# Altium PCB Slot.PcbDoc (part 1 of 4)
Units mm, origin at the board's own origin, x right, y up, seen from the top; angles counter-clockwise.
Board outline 152.4 x 101.6 mm, 2 copper layers (Top Layer, Bottom Layer); 34 components, 37 nets, 230 pads, 62 vias.
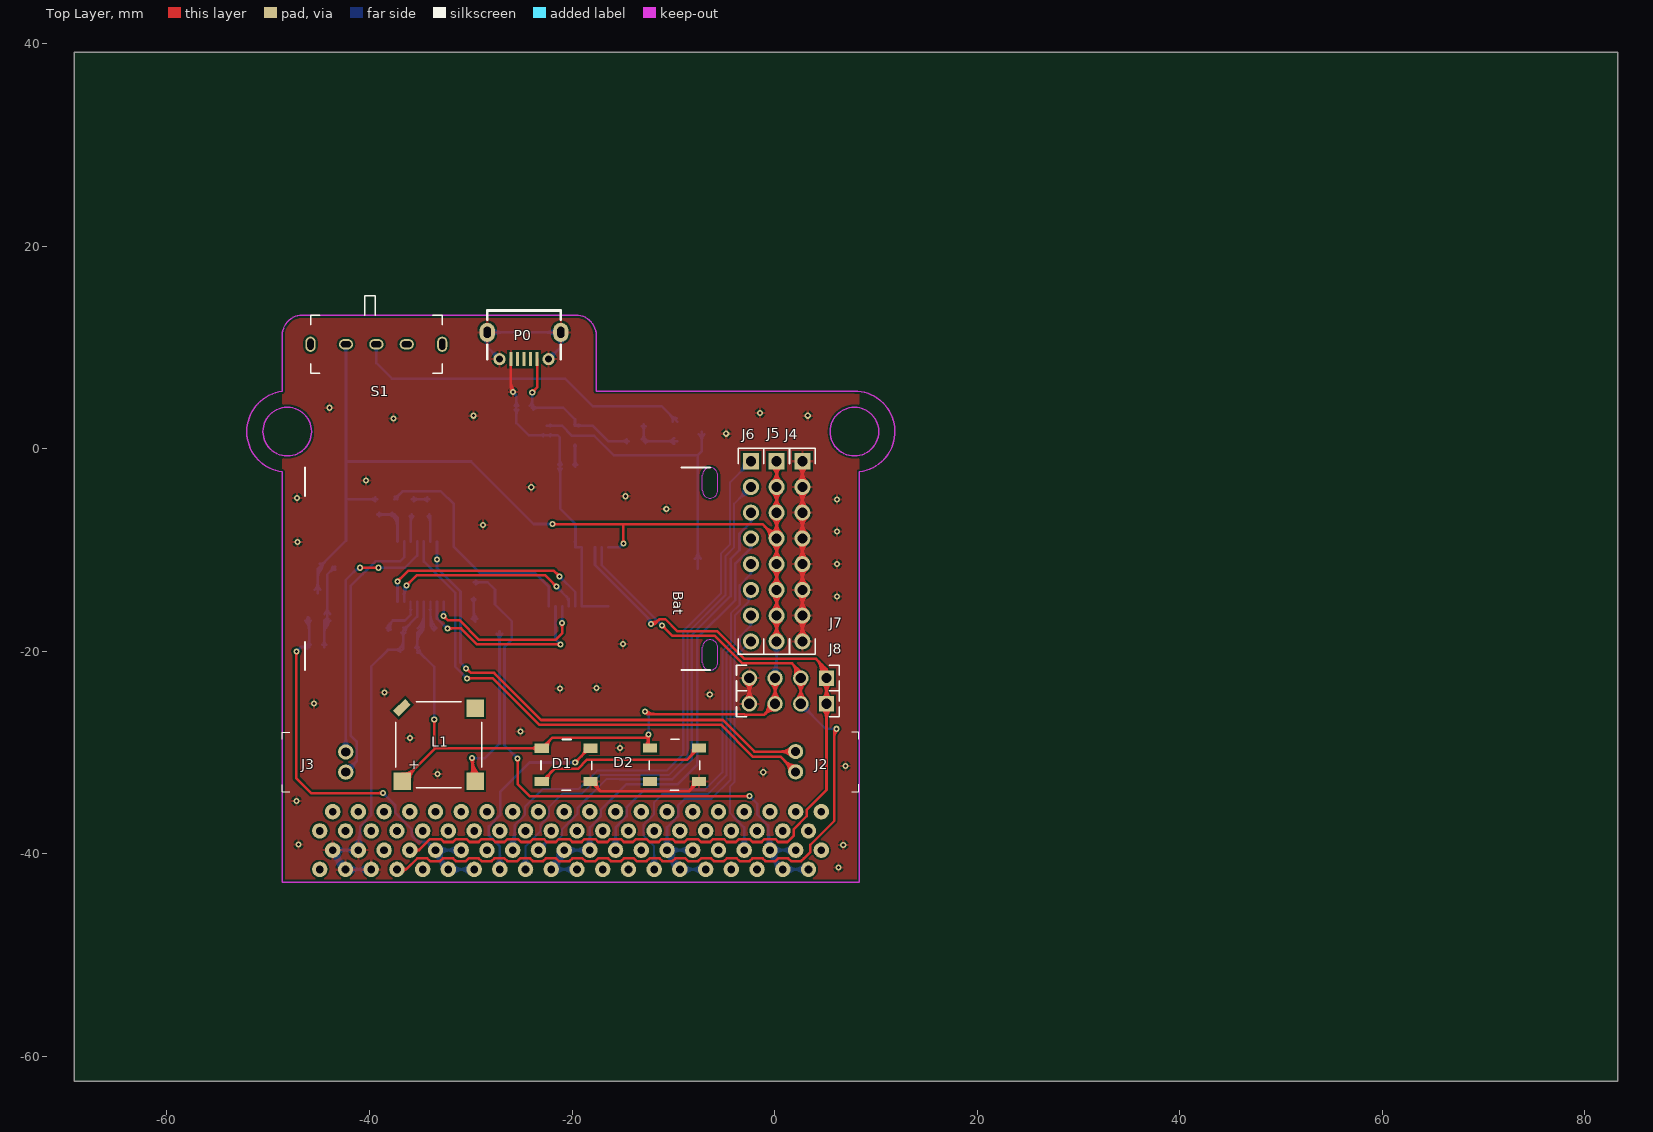
[diagram p0: Top Layer view]
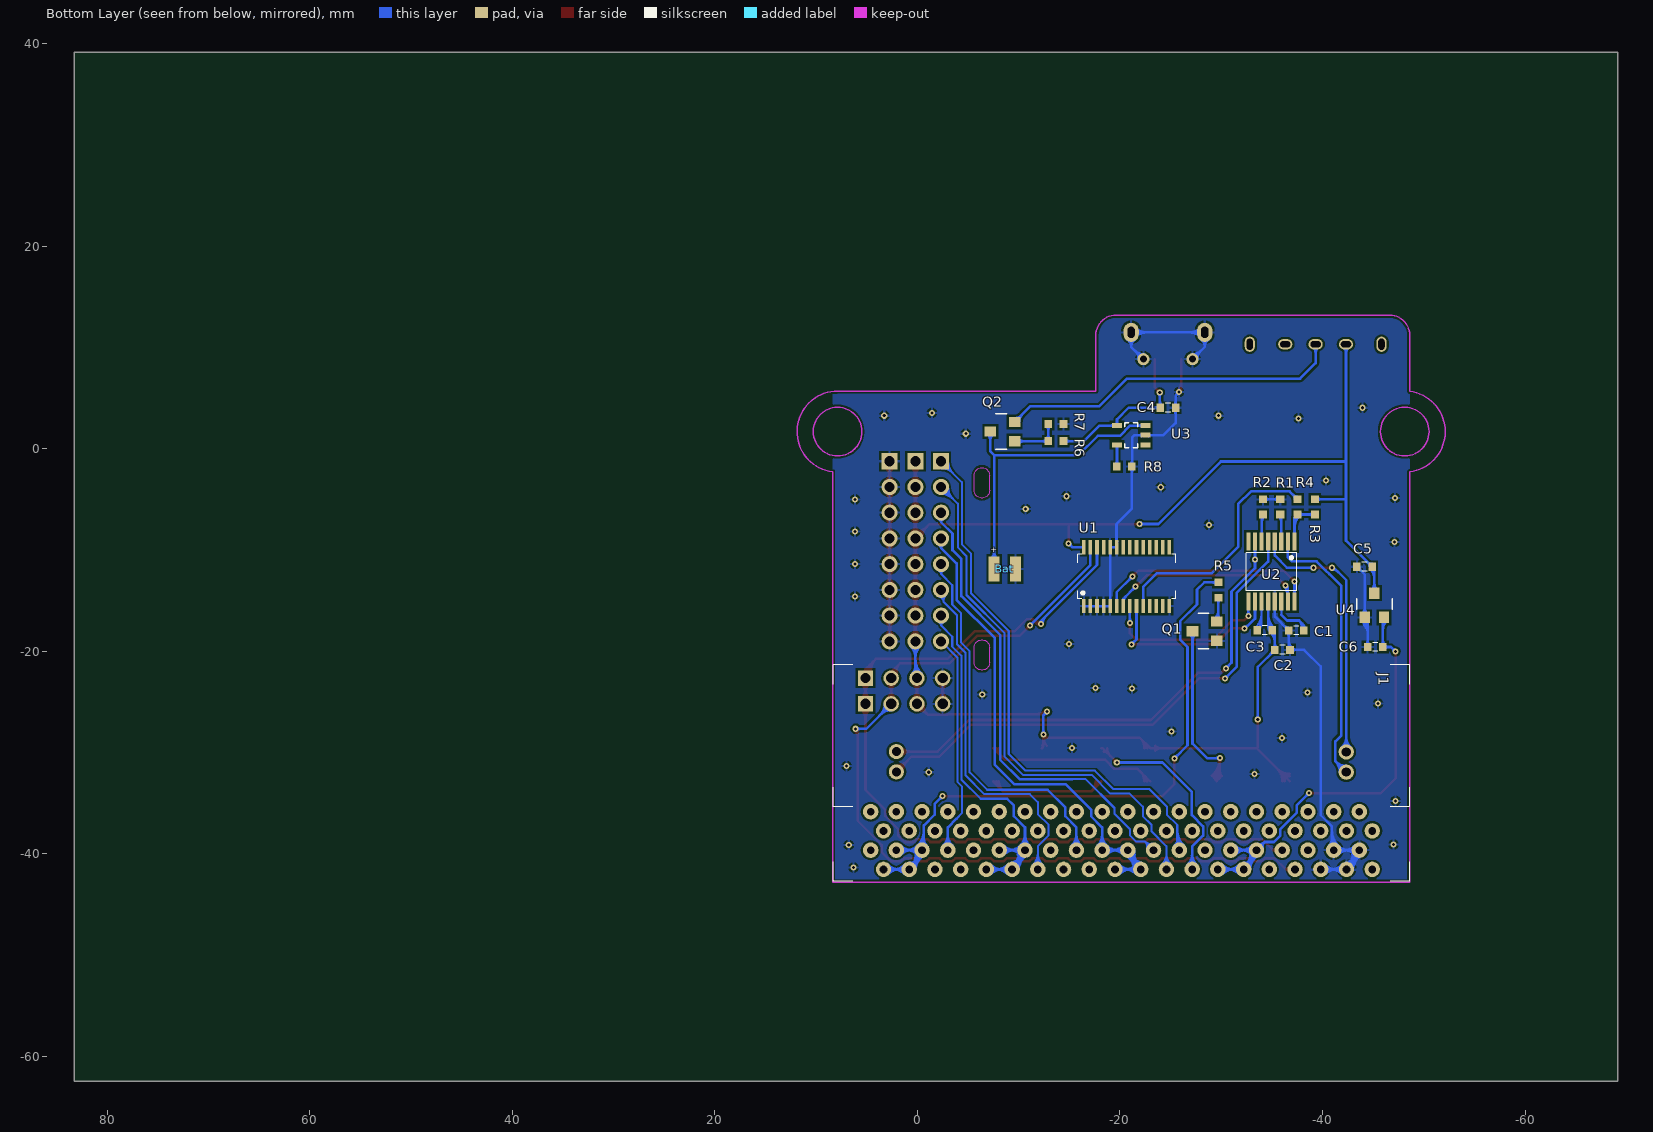
[diagram p1: Bottom Layer view, seen from below]

## Layer stack, top to bottom
Top Layer: signal copper 0.0356
Dielectric: dielectric 0.32, FR-4, Dk 4.8
Bottom Layer: signal copper 0.0356

## Board outline
-69.148,-62.438 83.252,-62.438 83.252,39.162 -69.148,39.162

## Design rules (kind name [scope] priority, off if disabled: settings)
Clearance [All] p1: gap=0.203
MinimumSolderMaskSliver [All] p1: minsoldermaskwidth=0
PolygonConnect [All] p1: connectstyle=Relief reliefconductorwidth=0.254 reliefentries=4 polygonreliefangle="90 Angle"
RoutingVias [All] p1: holewidth=0.3 width=0.6 viastyle="Through Hole" minholewidth=0.3 minwidth=0.6 maxholewidth=0.3 maxwidth=0.6
SilkToSilkClearance [All] p1: silktosilkclearance=0
SilkscreenOverComponentPads [All] p1: minsilkscreentomaskgap=0
SolderMaskExpansion [All] p1: expansion=0.102
Width [All] p1: maxlimit=0.254 minlimit=0.152 preferedwidth=0.203
25 further rules are at their usual default settings.

## Components (designator, comment, footprint, x,y, rotation, side; value= is the part's Value field where it differs from the comment)
Bat "" BAT-2040 -6.375,-1.854 r0 top locked
C1 "" C0603 -37.414,-17.932 r270 bottom
C2 "" C0603 -36.043,-19.837 r270 bottom
C3 "16V" C0603 -34.29,-17.907 r90 bottom
C4 "" C0603 -24.74,4.064 r270 bottom
C5 "" C0603 -44.145,-11.633 r90 bottom
C6 "" C0603 -45.212,-19.558 r90 bottom
D1 "WS2812B" WS2812B -23.066,-28.695 r0 top locked
D2 "WS2812B" WS2812B -12.372,-28.684 r0 top locked
J1 "MICROBIT_SLOT" microbit_slot 4.62,-35.821 r180 bottom locked
J2 "" S2B-PH-K-S 2.08,-29.889 r0 top locked
J3 "" S2B-PH-K-S -42.344,-31.921 r180 top locked
J4 "CON8" CON8 2.743,-1.219 r0 top
J5 "CON8" CON8 0.203,-1.219 r0 top
J6 "CON8" CON8 -2.337,-1.219 r0 top
J7 "" CON4 5.128,-25.171 r180 top
J8 "" CON4 5.128,-22.631 r180 top
L1 "Buz" Buzzer -28.908,-24.961 r270 top
P0 "" USB_MICRO -24.74,8.865 r0 top
Q1 "2N3904" SOT23-3 -29.566,-18.948 r0 bottom
Q2 "DMP2305U" SOT23-3 -9.601,0.762 r0 bottom
R1 "200R" R0603 -35.827,-6.477 r0 bottom
R2 "200R" R0603 -34.112,-6.477 r0 bottom
R3 "20K" R0603 -39.243,-6.477 r0 bottom
R4 "0R" R0603 -37.541,-6.477 r0 bottom
R5 "470R" R0603 -29.718,-13.183 r180 bottom
R6 "10k" R0603 -14.423,0.762 r270 bottom
R7 "1M" R0603 -14.423,2.454 r270 bottom
R8 "8.2k" R0603 -21.184,-1.753 r270 bottom
S1 "" SWITCH-1 -45.822,13.183 r0 top
U1 "PCA9685" TSSOP-28 -16.434,-15.519 r90 bottom
U2 "DRV8833" TSSOP-16 -37.236,-9.144 r270 bottom
U3 "CE3150AM" SOT23-5 -22.504,0.406 r90 bottom
U4 "S-1206B30-M3T1G(S)" SOT23-3 -44.171,-16.637 r90 bottom

## Footprints (in the part's own frame and the unit in brackets; to place one, negate y for a bottom-side part, rotate by r counter-clockwise, add the part's x,y. Pads: shape width x height; smd on the part's side, far side on the other; paste and mask are expansions set on the pad)
BAT-2040 [mm]
  rect 1.1x2.5 smd far side: 1(-1.2,-10) 2(-3.3,-10)
  Keep-Out Layer lines w0.1: -0.75,-19.25 ccw(c0,-19.25) 0.75,-19.25 0.75,-17.75 ccw(c0,-17.75) -0.75,-17.75 -0.75,-19.25 ; -0.75,-2.25 ccw(c0,-2.25) 0.75,-2.25 0.75,-0.75 ccw(c0,-0.75) -0.75,-0.75 -0.75,-2.25
  silkscreen extent -40,-20 0,0
Buzzer [mm]
  rect 1.7x1.7 smd: 1(7.85,-7.85) 2(7.85,-0.65) ""(0.65,-0.65)
  rect 1.7x0.8 smd rot 135: ""(0.6,-7.9)
  silkscreen extent 0,-8.5 8.5,0
C0603 [mm] "0.8(无"
  rect 0.8x0.75 smd: 1(0,0.75) 2(0,-0.75)
  silkscreen extent -0.43,-0.25 0.43,0.25
CON4 [mil] "2.54mm"
  rect 60x60 hole 40: 1(0,0)
  round 60 hole 40: 2(100,0) 3(200,0) 4(300,0)
  silkscreen extent -50,-50 350,50
CON8 [mm] "2.54针"
  rect 1.6x1.6 hole 1: 1(0,0)
  round 1.6 hole 1: 2(0,-2.54) 3(0,-5.08) 4(0,-7.62) 5(0,-10.16) 6(0,-12.7) 7(0,-15.24) 8(0,-17.78)
  silkscreen extent -1.27,-19.05 1.27,1.27
microbit_slot [mil]
  round 60 hole 30: 1(0,-149.61) 2(0,0) 3(50,-224.41) 4(50,-74.8) 5(100,-149.61) 6(100,0) 7(150,-224.41) 8(150,-74.8) 9(200,-149.61) 10(200,0) 11(250,-224.41) 12(250,-74.8) 13(300,-149.61) 14(300,0) 15(350,-224.41) 16(350,-74.8) 17(400,-149.61) 18(400,0) 19(450,-224.41) 20(450,-74.8) 21(500,-149.61) 22(500,0) 23(550,-224.41) 24(550,-74.8) 25(600,-149.61) 26(600,0) 27(650,-224.41) 28(650,-74.8) 29(700,-149.61) 30(700,0) 31(750,-224.41) 32(750,-74.8) 33(800,-149.61) 34(800,0) 35(850,-224.41) 36(850,-74.8) 37(900,-149.61) 38(900,0) 39(950,-224.41) 40(950,-74.8) 41(1000,-149.61) 42(1000,0) 43(1050,-224.41) 44(1050,-74.8) 45(1100,-149.61) 46(1100,0) 47(1150,-224.41) 48(1150,-74.8) 49(1200,-149.61) 50(1200,0) 51(1250,-224.41) 52(1250,-74.8) 53(1300,-149.61) 54(1300,0) 55(1350,-224.41) 56(1350,-74.8) 57(1400,-149.61) 58(1400,0) 59(1450,-224.41) 60(1450,-74.8) 61(1500,-149.61) 62(1500,0) 63(1550,-224.41) 64(1550,-74.8) 65(1600,-149.61) 66(1600,0) 67(1650,-224.41) 68(1650,-74.8) 69(1700,-149.61) 70(1700,0) 71(1750,-224.41) 72(1750,-74.8) 73(1800,-149.61) 74(1800,0) 75(1850,-224.41) 76(1850,-74.8) 77(1900,-149.61) 78(1900,0) 79(1950,-224.41) 80(1950,-74.8)
  silkscreen extent -145,-270 2095,571
R0603 [mm] "Microbit"
  rect 0.8x0.75 smd: 1(0,0) 2(0,-1.5)
S2B-PH-K-S [mm] "JST"
  round 1.5 hole 0.9: 1(0,0) 2(0,-2)
  silkscreen extent 5.54,-3.95 6.25,1.95
SOT23-3 [mil]
  rect 45x40 smd: 1(0,0) 2(0,-74.8) 3(94.49,-37.4)
  silkscreen extent 31,-106 73,31
SOT23-5 [mm]
  rect 0.5x1 smd: 1(0,0) 2(0.95,0) 3(1.9,0) 4(1.9,2.8) 5(0,2.8)
  silkscreen extent -0.3,0.76 2.18,2.03
SWITCH-1 [mm] "拨"
  oval 1.4x1 hole 0.6 slot 1 at 0 deg: 1(3.5,-2.85) 2(6.5,-2.85) 3(9.5,-2.85)
  oval 1x1.5 hole 0.6 slot 1.1 at 90 deg: ""(0,-2.85) ""(13,-2.85)
  silkscreen extent 0,-5.7 13,1.96
TSSOP-16 [mm]
  rect 1.78x0.42 smd: 1(0,0) 2(0,-0.65) 3(0,-1.3) 4(0,-1.95) 5(0,-2.6) 6(0,-3.25) 7(0,-3.9) 8(0,-4.55) 9(5.94,-4.55) 10(5.94,-3.9) 11(5.94,-3.25) 12(5.94,-2.6) 13(5.94,-1.95) 14(5.94,-1.3) 15(5.94,-0.65) 16(5.94,0)
  silkscreen extent 1.09,-4.77 4.85,0.23
TSSOP-28 [mm]
  rect 1.4x0.35 smd: 1(0,0) 2(0,-0.65) 3(0,-1.3) 4(0,-1.95) 5(0,-2.6) 6(0,-3.25) 7(0,-3.9) 8(0,-4.55) 9(0,-5.2) 10(0,-5.85) 11(0,-6.5) 12(0,-7.15) 13(0,-7.8) 14(0,-8.45) 15(5.8,-8.45) 16(5.8,-7.8) 17(5.8,-7.15) 18(5.8,-6.5) 19(5.8,-5.85) 20(5.8,-5.2) 21(5.8,-4.55) 22(5.8,-3.9) 23(5.8,-3.25) 24(5.8,-2.6) 25(5.8,-1.95) 26(5.8,-1.3) 27(5.8,-0.65) 28(5.8,0)
  silkscreen extent 0.7,-9.08 5.1,0.62
USB_MICRO [mil] "USB Micro SMT 5S B"
  rect 11.81x54 smd: 1(51,0) 2(25.5,0) 3(0,0) 4(-25.5,0) 5(-51,0)
  oval 59.06x74.8 hole 27.56 slot 43.31 at 90 deg: 6(-143,104) 6(143,104)
  round 47.24 hole 27.5: 6(-95.5,0) 6(95.5,0)
  silkscreen extent -143,0 143,189
WS2812B [mm]
  rect 1.4x0.9 smd: 1(0.07,-0.86) 2(0.076,-4.14) 3(4.9,-4.14) 4(4.9,-0.86)
  silkscreen extent 0,-5 5,0

## Part data
Bat: library part Battery2040, "2x4cm Li-bat"
C1 C2 C3 C4 C5 C6: library part Cap
J2 J3: library part CON2_power
J7 J8: library part CON4
L1: library part Buzzer
P0: library part micro_usb
Q1: "NPN General Purpose Amplifier"
Q2: library part "MOSFET P"
R1 R2 R3 R4 R5 R6 R7 R8: library part Res
S1: library part CON3, "Header, 3-Pin"
U2: "TSSOP-16"
U3: "LI-Ion battery charger with Thermal Regulation"
U4: library part S-1206BXX

## Via types
v1: diameter 0.6, hole 0.3, Top Layer to Bottom Layer, 62 vias

## Nets (pads, with @x,y where several pads share a name; then routed paths per layer and width w, separated by ;. In a path a pad name is that pad's centre, name@x,y a point inside that pad or via, vN(x,y) a via of type N, cw(c..) or ccw(c..) an arc to the next point about the centre after c; other vN are vias at no path point)
5V: C4.2 P0.1 R6.1 U3.4 | length 27
  Top Layer w0.254: v1(-23.927,5.588) -23.444,6.071 P0.1@-23.444,8.865 ; v1@-23.927,5.761 ccw(c-23.927,6.179) -23.631,5.883 ccw(c-23.336,5.588) v1@-23.754,5.588
  Bottom Layer w0.254: C4.2@-24.165,4.264 ccw(c-24.74,4.839) -23.927,4.839 ; v1@-24.049,5.466 cw(c-24.344,5.17) -23.927,5.17 cw(c-23.509,5.17) v1@-23.804,5.466 ; -23.927,4.536 ccw(c-23.542,4.536) C4.2@-23.814,4.264 ; v1(-23.927,5.588) -23.927,4.127 C4.2@-23.99,4.064 -20.853,4.064 -19.704,2.915 U3.4@-19.704,2.306 -17.978,2.306 -16.434,0.762 R6.1@-14.423,0.762 ; C4.2@-23.814,3.889 cw(c-23.391,3.465) -23.391,4.064 ; C4.2@-23.814,3.889 cw(c-23.391,3.465) -23.391,4.064 ; C4.2@-23.814,3.889 cw(c-23.391,3.465) -23.391,4.064 ; C4.2@-23.814,4.239 ccw(c-23.391,4.663) -23.391,4.064 ; C4.2@-23.814,4.239 ccw(c-23.391,4.663) -23.391,4.064 ; C4.2@-23.814,4.239 ccw(c-23.391,4.663) -23.391,4.064 ; U3.4@-19.791,2.393 ccw(c-20.001,2.603) -19.704,2.603 ; U3.4@-19.791,2.393 ccw(c-20.001,2.603) -19.704,2.603 ; U3.4@-19.791,2.393 ccw(c-20.001,2.603) -19.704,2.603 ; -19.704,2.603 ccw(c-19.407,2.603) U3.4@-19.617,2.393 ; -19.704,2.603 ccw(c-19.407,2.603) U3.4@-19.617,2.393 ; -19.704,2.603 ccw(c-19.407,2.603) U3.4@-19.617,2.393 ; U3.4@-19.367,2.219 cw(c-19.157,2.009) -19.157,2.306 ; U3.4@-19.367,2.219 cw(c-19.157,2.009) -19.157,2.306 ; U3.4@-19.367,2.219 cw(c-19.157,2.009) -19.157,2.306 ; U3.4@-19.367,2.393 ccw(c-19.157,2.603) -19.157,2.306 ; U3.4@-19.367,2.393 ccw(c-19.157,2.603) -19.157,2.306 ; U3.4@-19.367,2.393 ccw(c-19.157,2.603) -19.157,2.306 ; -15.021,0.762 ccw(c-15.021,1.361) R6.1@-14.598,0.937 ; -15.021,0.762 cw(c-15.021,0.163) R6.1@-14.598,0.587 ; -15.021,0.762 ccw(c-15.021,1.361) R6.1@-14.598,0.937 ; -15.021,0.762 cw(c-15.021,0.163) R6.1@-14.598,0.587 ; -15.021,0.762 ccw(c-15.021,1.361) R6.1@-14.598,0.937 ; -15.021,0.762 cw(c-15.021,0.163) R6.1@-14.598,0.587
AIN1: U1.6 U2.16 | length 24.9
  Top Layer w0.254: v1(-37.236,-13.081) -36.17,-12.014 -21.818,-12.014 v1(-21.234,-12.598) ; v1@-37.236,-12.908 ccw(c-37.236,-12.49) -36.941,-12.786 ccw(c-36.646,-13.081) v1@-37.063,-13.081 ; v1@-21.407,-12.598 ccw(c-21.825,-12.598) -21.53,-12.303 ccw(c-21.234,-12.008) v1@-21.234,-12.425
  Bottom Layer w0.254: v1@-37.359,-13.203 cw(c-37.654,-13.499) -37.236,-13.499 cw(c-36.819,-13.499) v1@-37.114,-13.203 ; U2.16@-37.236,-15.084 v1(-37.236,-13.081) ; v1@-21.234,-12.771 cw(c-21.234,-13.189) -20.939,-12.894 cw(c-20.644,-12.598) v1@-21.061,-12.598 ; v1(-21.234,-12.598) -19.684,-14.149 U1.6@-19.684,-15.519
AIN2: U1.7 U2.15 | length 31.7
  Top Layer w0.254: v1(-36.347,-13.487) -35.331,-12.471 -22.657,-12.471 v1(-21.539,-13.589) ; v1@-36.347,-13.314 ccw(c-36.347,-12.897) -36.052,-13.192 ccw(c-35.757,-13.487) v1@-36.174,-13.487 ; v1@-21.712,-13.589 ccw(c-22.13,-13.589) -21.835,-13.294 ccw(c-21.539,-12.998) v1@-21.539,-13.416
  Bottom Layer w0.254: U2.15@-36.586,-15.084 -36.586,-13.726 v1(-36.347,-13.487) ; v1(-21.539,-13.589) -20.334,-14.794 U1.7@-20.334,-15.519 ; U2.15@-36.628,-14.332 ccw(c-36.763,-14.099) -36.502,-14.169 ; U2.15@-36.628,-14.332 ccw(c-36.763,-14.099) -36.502,-14.169 ; U2.15@-36.628,-14.332 ccw(c-36.763,-14.099) -36.502,-14.169 ; U2.15@-36.586,-14.482 cw(c-35.353,-14.482) v1@-36.225,-13.61 ; U2.15@-36.586,-14.482 cw(c-35.353,-14.482) v1@-36.225,-13.61 ; U2.15@-36.586,-14.482 cw(c-35.353,-14.482) v1@-36.225,-13.61 ; -36.586,-13.869 cw(c-35.966,-13.869) v1@-36.405,-13.43 ; -36.586,-13.869 cw(c-35.966,-13.869) v1@-36.405,-13.43 ; -36.586,-13.869 cw(c-35.966,-13.869) v1@-36.405,-13.43 ; -36.496,-14.079 ccw(c-36.932,-13.827) v1@-36.497,-13.574 ; -36.496,-14.079 ccw(c-36.932,-13.827) v1@-36.497,-13.574 ; -36.496,-14.079 ccw(c-36.932,-13.827) v1@-36.497,-13.574 ; v1@-21.539,-13.762 cw(c-21.539,-14.18) -21.244,-13.884 ; v1@-21.539,-13.762 cw(c-21.539,-14.18) -21.244,-13.884 ; v1@-21.539,-13.762 cw(c-21.539,-14.18) -21.244,-13.884 ; v1@-21.366,-13.589 ccw(c-20.949,-13.589) -21.244,-13.884 ; v1@-21.366,-13.589 ccw(c-20.949,-13.589) -21.244,-13.884 ; v1@-21.366,-13.589 ccw(c-20.949,-13.589) -21.244,-13.884 ; -20.557,-14.571 cw(c-20.981,-14.994) U1.7@-20.382,-14.994 ; -20.557,-14.571 cw(c-20.981,-14.994) U1.7@-20.382,-14.994 ; -20.557,-14.571 cw(c-20.981,-14.994) U1.7@-20.382,-14.994 ; -20.438,-14.786 ccw(c-20.173,-14.715) U1.7@-20.31,-14.953 ; -20.438,-14.786 ccw(c-20.173,-14.715) U1.7@-20.31,-14.953 ; -20.438,-14.786 ccw(c-20.173,-14.715) U1.7@-20.31,-14.953
BIN1: U1.8 U2.9 | length 21
  Top Layer w0.254: v1@-32.686,-16.686 cw(c-32.686,-17.104) -32.391,-16.809 cw(c-32.096,-16.513) v1@-32.513,-16.513 ; v1(-32.686,-16.513) -32.283,-16.916 -31.129,-16.916 -29.199,-18.847 -21.654,-18.847 -20.964,-18.156 -20.964,-17.212 v1(-20.984,-17.192) ; v1@-21.106,-17.315 cw(c-21.45,-17.658) -20.964,-17.658 ; -20.964,-17.562 cw(c-20.614,-17.562) v1@-20.861,-17.315
  Bottom Layer w0.254: v1(-32.686,-16.513) U2.9@-32.686,-15.084 ; v1@-21.106,-17.07 ccw(c-21.401,-16.775) -20.984,-16.775 ccw(c-20.566,-16.775) v1@-20.861,-17.07 ; v1(-20.984,-17.192) U1.8@-20.984,-15.519 ; v1@-32.809,-16.391 ccw(c-33.104,-16.096) -32.686,-16.096 ; v1@-32.809,-16.391 ccw(c-33.104,-16.096) -32.686,-16.096 ; v1@-32.809,-16.391 ccw(c-33.104,-16.096) -32.686,-16.096 ; -32.686,-16.096 ccw(c-32.269,-16.096) v1@-32.564,-16.391 ; -32.686,-16.096 ccw(c-32.269,-16.096) v1@-32.564,-16.391 ; -32.686,-16.096 ccw(c-32.269,-16.096) v1@-32.564,-16.391
BIN2: U1.9 U2.10 | length 22.3
  Top Layer w0.254: v1(-32.283,-17.729) -30.963,-17.729 -29.388,-19.304 v1(-21.133,-19.304) ; v1@-32.161,-17.852 cw(c-31.866,-18.147) -31.866,-17.729 cw(c-31.866,-17.312) v1@-32.161,-17.607 ; v1@-21.255,-19.426 ccw(c-21.55,-19.722) -21.55,-19.304 ccw(c-21.55,-18.886) v1@-21.255,-19.182
  Bottom Layer w0.254: U2.10@-33.336,-15.084 -33.336,-16.754 -32.362,-17.729 v1(-32.283,-17.729) ; U1.9@-21.634,-15.519 -21.634,-18.803 v1(-21.133,-19.304) ; v1@-21.306,-19.304 ccw(c-21.723,-19.304) -21.428,-19.009 ccw(c-21.133,-18.713) v1@-21.133,-19.131 ; -32.712,-17.379 ccw(c-32.283,-16.95) v1@-32.283,-17.556 ; -32.712,-17.379 ccw(c-32.283,-16.95) v1@-32.283,-17.556 ; -32.712,-17.379 ccw(c-32.283,-16.95) v1@-32.283,-17.556